# EAGLE board Layout (EAGLE 8.4.0)
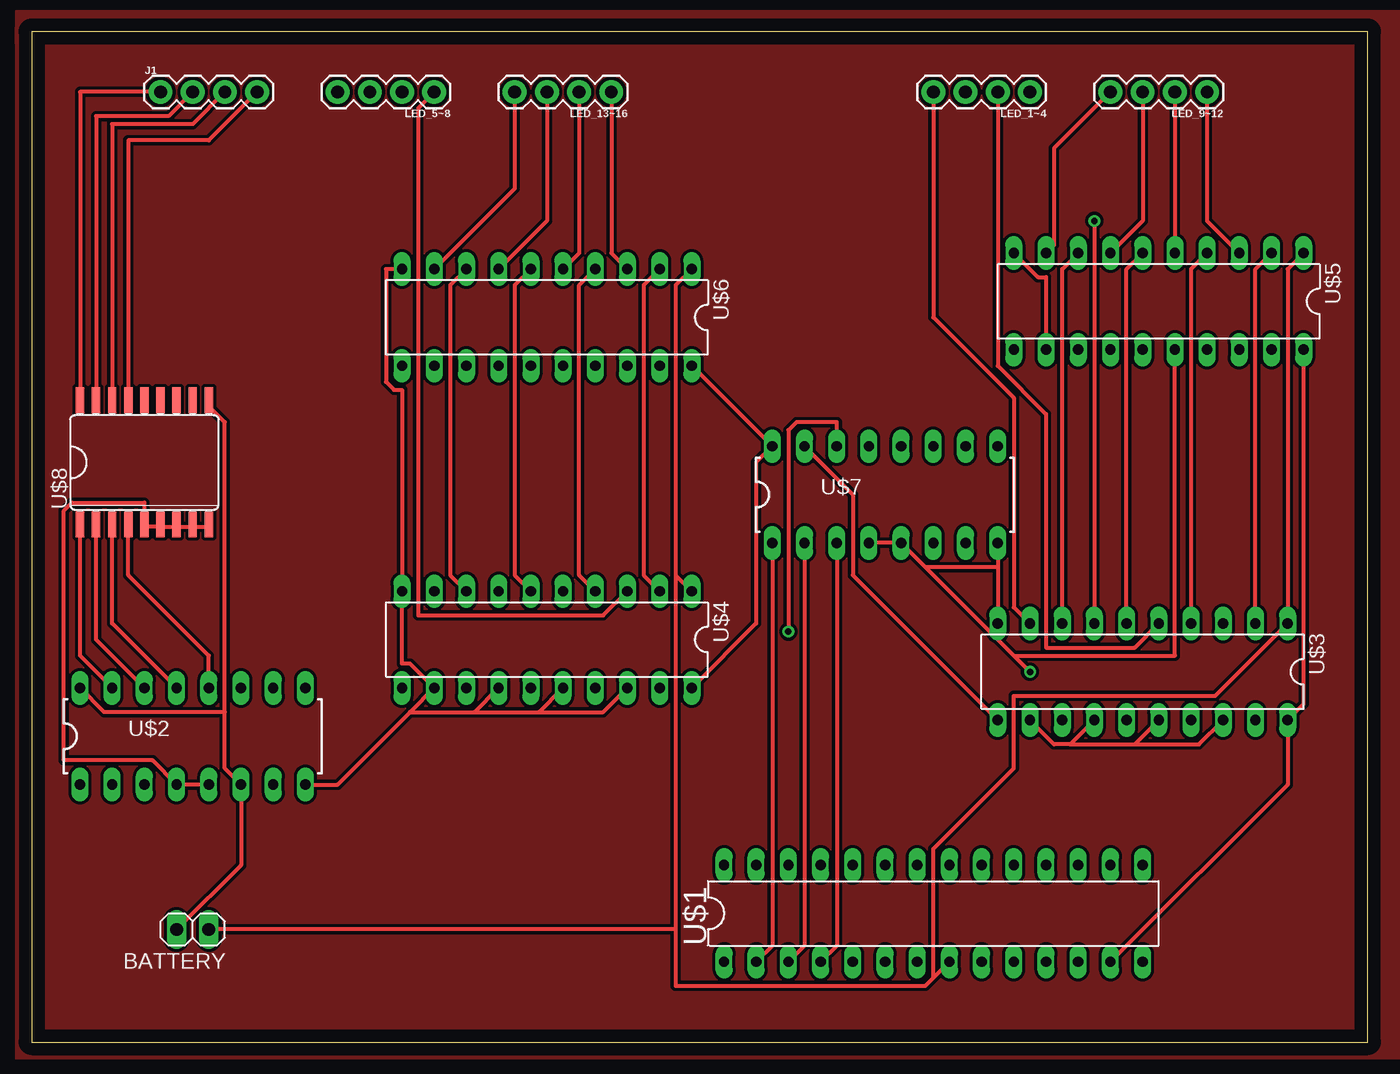
[diagram p0: board, top side]
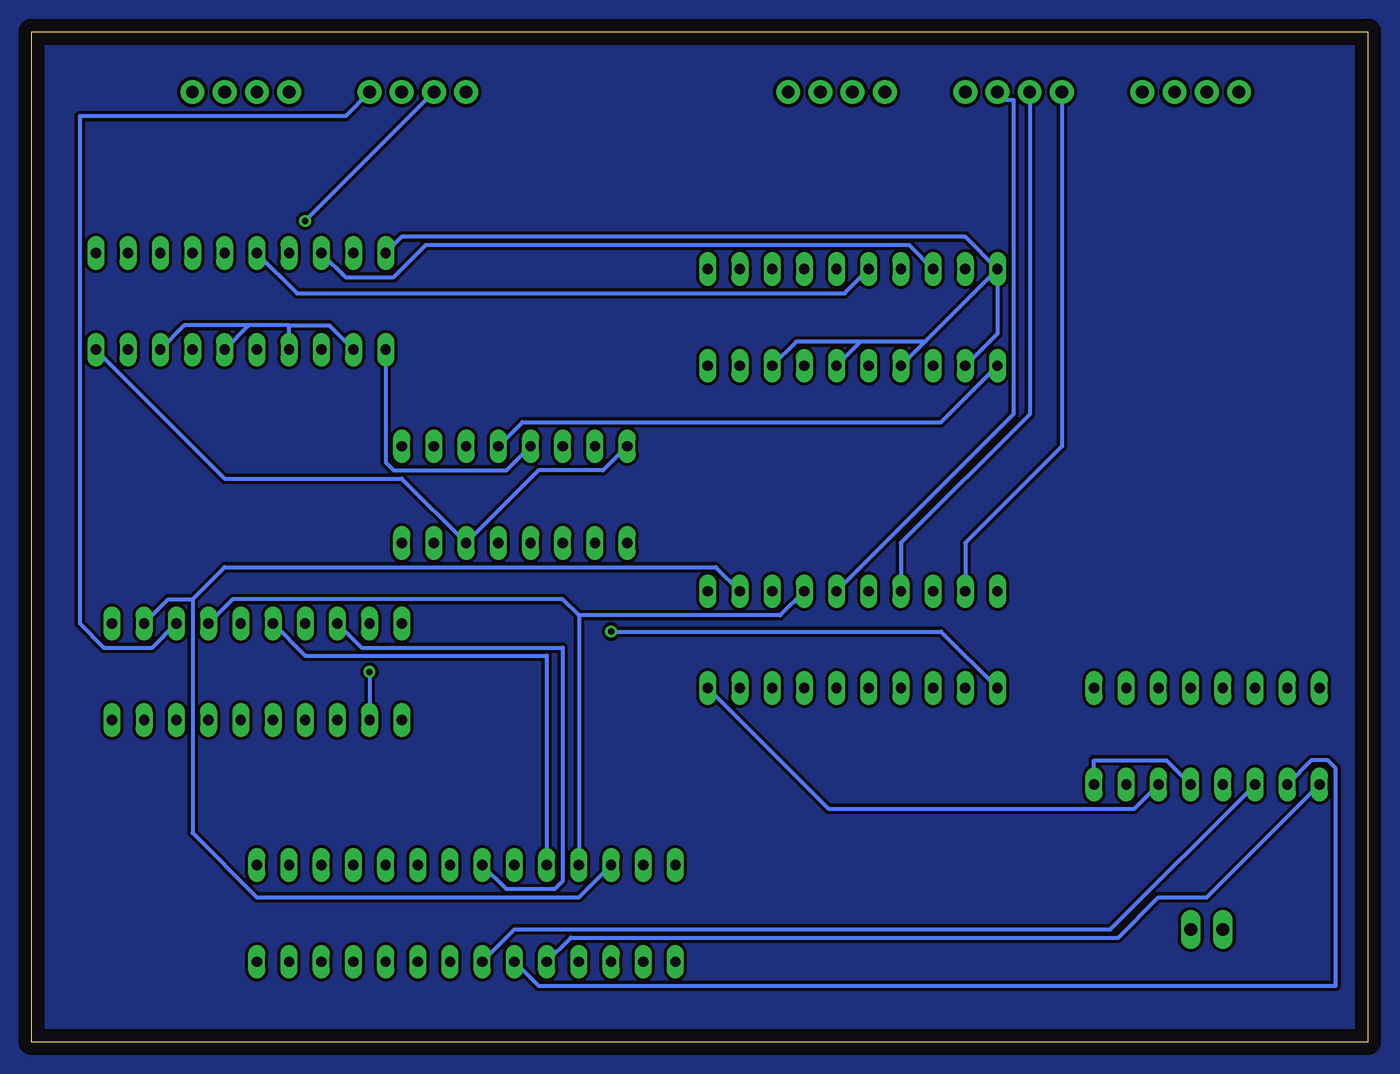
[diagram p1: board, bottom side, seen from below]

Size 105.39 x 79.68 mm. Coordinates in mm from the lower left corner, seen from the top.
Outline: 0,0 105.39,0 105.39,79.68 0,79.68 0,0
Copper layers (1*16): Top 0.035mm / dielectric 1.5mm / Bottom 0.035mm
Design rules "default": minimum track width 6mil, minimum drill 0.35mm, track to track 6mil, track to pad 6mil, pad to pad 6mil, via to via 6mil, smd to smd 6mil, copper to edge 40mil, drill to drill 6mil, minimum pad ring 10mil, minimum via ring 8mil, stop-mask expansion 4mil, vias tented up to drill 0mil, thermal gap 10mil
Net classes: 0 default: width 0.305 mm, drill 0.508 mm, clearance 0.254 mm

## Footprints (pad centres in the part's own frame; a part is rotated, then mirrored left to right if it is on the bottom)
1X02 = drill 1.016 long: 1 -1.27,0; 2 1.27,0
1X04 = drill 1.016 pad 1.88: 1 0,0; 2 2.54,0; 3 5.08,0; 4 7.62,0
DIL28-3 = drill 0.813 long: 1 -16.51,-3.81; 2 -13.97,-3.81; 3 -11.43,-3.81; 4 -8.89,-3.81; 5 -6.35,-3.81; 6 -3.81,-3.81; 7 -1.27,-3.81; 8 1.27,-3.81; 9 3.81,-3.81; 10 6.35,-3.81; 11 8.89,-3.81; 12 11.43,-3.81; 13 13.97,-3.81; 14 16.51,-3.81; 15 16.51,3.81; 16 13.97,3.81; 17 11.43,3.81; 18 8.89,3.81; 19 6.35,3.81; 20 3.81,3.81; 21 1.27,3.81; 22 -1.27,3.81; 23 -3.81,3.81; 24 -6.35,3.81; 25 -8.89,3.81; 26 -11.43,3.81; 27 -13.97,3.81; 28 -16.51,3.81
DIL16 = drill 0.813 long: 1 -8.89,-3.81; 2 -6.35,-3.81; 3 -3.81,-3.81; 4 -1.27,-3.81; 5 1.27,-3.81; 6 3.81,-3.81; 7 6.35,-3.81; 8 8.89,-3.81; 9 8.89,3.81; 10 6.35,3.81; 11 3.81,3.81; 12 1.27,3.81; 13 -1.27,3.81; 14 -3.81,3.81; 15 -6.35,3.81; 16 -8.89,3.81
DIL20 = drill 0.813 long: 1 -11.43,-3.81; 2 -8.89,-3.81; 3 -6.35,-3.81; 4 -3.81,-3.81; 5 -1.27,-3.81; 6 1.27,-3.81; 7 3.81,-3.81; 8 6.35,-3.81; 9 8.89,-3.81; 10 11.43,-3.81; 11 11.43,3.81; 12 8.89,3.81; 13 6.35,3.81; 14 3.81,3.81; 15 1.27,3.81; 16 -1.27,3.81; 17 -3.81,3.81; 18 -6.35,3.81; 19 -8.89,3.81; 20 -11.43,3.81
SO18L = smd 0.66 x 2.032: 1 -5.08,-4.902; 2 -3.81,-4.902; 3 -2.54,-4.902; 4 -1.27,-4.902; 5 0,-4.902; 6 1.27,-4.902; 7 2.54,-4.902; 8 3.81,-4.902; 9 5.08,-4.902; 10 5.08,4.902; 11 3.81,4.902; 12 2.54,4.902; 13 1.27,4.902; 14 0,4.902; 15 -1.27,4.902; 16 -2.54,4.902; 17 -3.81,4.902; 18 -5.08,4.902

## Placement (x,y rotation side)
BATTERY  [1X02]  12.7,8.89 180 top
J1  [1X04]  10.16,74.93 0 top
LED_1~4  LED4  [1X04]  78.74,74.93 180 top
LED_5~8  LED4  [1X04]  31.75,74.93 180 top
LED_9~12  LED4  [1X04]  92.71,74.93 180 top
LED_13~16  LED4  [1X04]  45.72,74.93 180 top
U$1  PIC32MX250F128B  [DIL28-3]  71.12,10.16 0 top
U$2  CD74HC238E  [DIL16]  12.7,24.13 0 top
U$3  SN74ABT374AN  [DIL20]  87.63,29.21 180 top
U$4  SN74ABT374AN  [DIL20]  40.64,31.75 180 top
U$5  SN74ABT374AN  [DIL20]  88.9,58.42 180 top
U$6  SN74ABT374AN  [DIL20]  40.64,57.15 180 top
U$7  CD74HC238E  [DIL16]  67.31,43.18 0 top
U$8  ULN2803  [SO18L]  8.89,45.72 0 top

## Library data of the parts
BATTERY = pinhead
J1 = SparkFun-Connectors; PROD_ID: CONN-09696
LED_1~4 LED_5~8 LED_9~12 LED_13~16 U$1-U$7 = ECE411
U$8 = uln2803

## Nets
DIODE: BATTERY.2 U$1.13 U$2.6 U$2.16 U$3.20 U$4.20 U$5.20 U$6.20 U$7.6 U$7.16 U$8.10
GND: U$2.4 U$2.5 U$2.8 U$3.10 U$3.12 U$3.14 U$3.16 U$3.18 U$4.10 U$4.12 U$4.14 U$4.16 U$4.18 U$5.10 U$5.12 U$5.14 U$5.16 U$5.18 U$6.10 U$6.12 U$6.14 U$6.16 U$6.18 U$7.4 U$7.5 U$7.8 U$8.5 U$8.6 U$8.7 U$8.8 U$8.9
LED1: LED_1~4.1 U$3.3
N$1: U$2.15 U$8.1
N$2: U$2.14 U$8.2
N$3: U$2.13 U$8.3
N$4: U$2.12 U$8.4
N$9: J1.1 U$8.18
N$10: J1.2 U$8.17
N$11: J1.3 U$8.16
N$12: J1.4 U$8.15
N$17: U$1.5 U$2.1
N$18: U$1.6 U$2.2
N$19: U$1.7 U$2.3
N$20: LED_9~12.1 U$5.3
N$21: BATTERY.1 U$1.8 U$3.1 U$4.1 U$5.1 U$6.1
N$22: U$1.26 U$3.2 U$4.2 U$5.2 U$6.2
N$23: U$1.25 U$3.4 U$4.4 U$5.4 U$6.4
N$24: U$1.22 U$3.8 U$4.8 U$5.8 U$6.8
N$25: U$1.24 U$3.6 U$4.6 U$5.6 U$6.6
N$31: U$3.11 U$7.15
N$32: U$4.11 U$7.14
N$33: U$1.3 U$7.2
N$34: U$1.4 U$7.3
N$35: U$5.11 U$7.13
N$36: U$6.11 U$7.12
N$38: LED_9~12.2 U$5.5
N$39: U$1.2 U$7.1
N$40: LED_1~4.2 U$3.5
N$41: LED_1~4.3 U$3.7
N$42: LED_1~4.4 U$3.9
N$43: LED_9~12.3 U$5.7
N$44: LED_9~12.4 U$5.9
N$47: LED_5~8.1 U$4.3
N$48: LED_5~8.2 U$4.5
N$49: LED_5~8.3 U$4.7
N$50: LED_5~8.4 U$4.9
N$63: LED_13~16.1 U$6.3
N$64: LED_13~16.2 U$6.5
N$65: LED_13~16.3 U$6.7
N$66: LED_13~16.4 U$6.9

## Tracks (layer width: path | path; a pad name or v marks a point on that pad's centre or on a via)
DIODE
  Top 0.305: 15.24,26.04 15.24,21.59 U$2.6 16.51,13.97 BATTERY.2 | 15.24,26.04 15.24,48.9 13.97,50.16 U$8.10 | U$2.16 5.72,26.04 15.24,26.04 | U$4.20 57.15,33.02 57.15,45.72 U$7.16 U$6.20 | U$1.13 99.06,20.32 U$3.20 100.33,26.67 U$5.20
  Bottom 0.305: U$7.16 60.33,45.09 65.41,45.09 U$7.6 76.2,44.45 90.17,44.45 U$5.20 | U$2.6 18.42,18.41 42.55,18.41 U$4.20
GND  (via drill 0.51)
  Top 0.305: U$7.4 U$7.5 70.48,37.47 | U$7.8 76.2,37.47 | 76.2,37.47 U$3.10 | 76.2,37.47 70.48,37.47 | U$2.5 U$2.4 9.53,22.22 2.54,22.22 2.54,41.91 3.18,42.55 8.89,42.55 U$8.5 8.89,40.64 10.16,40.64 | U$3.12 80.65,23.49 81.92,23.49 | U$3.14 81.92,23.49 | 87,23.49 U$3.16 | 81.92,23.49 87,23.49 | U$3.18 92.08,23.49 87,23.49 | 29.84,26.04 24.13,20.32 U$2.8 | 29.84,26.04 U$4.12 29.84,29.85 29.21,29.85 U$4.10 29.21,51.44 28.58,51.44 27.94,52.07 27.94,60.96 U$6.10 | 34.92,26.04 U$4.14 | 29.84,26.04 34.92,26.04 | 40.01,26.04 U$4.16 | 34.92,26.04 40.01,26.04 | U$4.18 45.09,26.04 40.01,26.04 | 70.48,37.47 77.47,30.48 | 77.47,30.48 v78.74,29.21 | U$5.12 80.01,60.32 79.38,60.32 U$5.10 | U$5.16 90.17,30.48 77.47,30.48 | 10.16,40.64 11.43,40.64 | 10.16,40.64 U$8.6 | 11.43,40.64 12.7,40.64 | 11.43,40.64 U$8.7 | 12.7,40.64 13.97,40.64 U$8.9 | 12.7,40.64 U$8.8
  Bottom 0.305: U$5.10 76.2,63.5 31.75,63.5 U$6.10 | U$5.12 81.92,56.52 85.09,56.52 | U$5.14 85.09,56.52 | 88.27,56.52 U$5.16 | 85.09,56.52 88.27,56.52 | U$5.18 93.34,56.52 88.27,56.52 | U$6.12 29.21,55.88 U$6.10 | U$6.10 34.92,55.25 | 34.92,55.25 U$6.14 | 40.01,55.25 U$6.16 | 34.92,55.25 40.01,55.25 | U$6.18 45.09,55.25 40.01,55.25 | v78.74,29.21 U$3.12 | U$2.5 15.88,22.22 21.59,22.22 U$2.8
LED1
  Bottom 0.305: U$3.3 95.88,31.11 99.69,31.11 101.6,33.02 101.6,73.02 80.65,73.02 LED_1~4.1
N$1
  Top 0.305: U$8.1 3.81,30.48 U$2.15
N$2
  Top 0.305: U$8.2 5.08,31.75 U$2.14
N$3
  Top 0.305: U$8.3 6.35,33.02 U$2.13
N$4
  Top 0.305: U$8.4 7.62,36.83 13.97,30.48 U$2.12
N$5
  pour Top: -1.27,80.01 -1.27,-1.27 107.95,-1.27 107.95,81.28 106.68,81.28 -1.27,81.28 -1.27,78.74
N$6
  pour Bottom: -2.54,81.28 -2.54,-3.81 109.22,-3.81 109.22,-2.54 109.22,82.55 106.68,82.55 -2.54,82.55 -2.54,80.01
N$9
  Top 0.305: U$8.18 3.81,74.93 J1.1
N$10
  Top 0.305: U$8.17 5.08,73.02 10.8,73.02 J1.2
N$11
  Top 0.305: U$8.16 6.35,72.39 12.7,72.39 J1.3
N$12
  Top 0.305: U$8.15 7.62,71.12 13.97,71.12 J1.4
N$17
  Bottom 0.305: U$2.1 12.7,11.43 16.51,11.43 19.69,8.25 62.87,8.25 U$1.5
N$18
  Bottom 0.305: U$2.2 4.45,22.22 3.18,22.22 2.54,21.59 2.54,4.44 65.41,4.44 U$1.6
N$19
  Bottom 0.305: U$2.3 20.32,8.89 67.31,8.89 U$1.7
N$20
  Top 0.305: U$5.3 92.71,64.77 LED_9~12.1
N$21
  Top 0.305: U$5.1 99.06,60.96 U$3.1 93.34,27.3 77.47,27.3 77.47,21.59 71.12,15.24 71.12,5.08 | 50.8,36.83 U$4.1 | 50.8,36.83 50.8,59.69 U$6.1 | 71.12,5.08 70.48,4.44 50.8,4.44 50.8,8.89 | 71.12,5.08 U$1.8 | 50.8,36.83 50.8,8.89 | 50.8,8.89 BATTERY.1
N$22
  Top 0.305: U$4.2 48.26,36.83 48.26,59.69 U$6.2 | U$5.2 96.52,60.96 U$3.2
  Bottom 0.305: U$1.26 62.23,11.43 87.63,11.43 92.71,16.51 92.71,34.93 | 92.71,34.93 94.62,34.93 U$3.2 | U$4.2 51.44,37.47 90.17,37.47 92.71,34.93
N$23
  Top 0.305: U$3.4 91.44,60.96 U$5.4 | U$6.4 43.18,59.69 43.18,36.83 U$4.4
  Bottom 0.305: 62.23,33.66 U$1.25 | 62.23,33.66 46.36,33.66 U$4.4 | U$3.4 89.53,34.93 63.5,34.93 62.23,33.66
N$24
  Top 0.305: U$4.8 33.02,36.83 33.02,59.69 U$6.8 | U$5.8 81.28,60.96 U$3.8
  Bottom 0.305: U$1.22 67.95,12.06 64.14,12.06 63.5,12.7 63.5,31.11 79.38,31.11 U$3.8 | U$6.8 36.2,62.87 74.3,62.87 76.84,60.32 80.65,60.32 U$5.8
N$25
  Top 0.305: U$4.6 38.1,36.83 38.1,59.69 U$6.6 | U$5.6 86.36,60.96 U$3.6
  Bottom 0.305: U$1.24 64.77,30.48 83.82,30.48 U$3.6 | U$6.6 41.28,59.05 84.45,59.05 U$5.6
N$31
  Top 0.305: U$3.11 64.77,36.83 64.77,43.18 U$7.15
N$32  (via drill 0.51)
  Top 0.305: v59.69,32.39 59.69,48.26 60.33,48.9 63.5,48.9 U$7.14
  Bottom 0.305: U$4.11 33.66,32.39 v59.69,32.39
N$33
  Top 0.305: U$1.3 60.96,7.62 U$7.2
N$34
  Top 0.305: U$1.4 63.5,7.62 U$7.3
N$35
  Bottom 0.305: U$7.13 67.95,45.09 76.84,45.09 77.47,45.72 U$5.11
N$36
  Bottom 0.305: U$6.11 33.66,48.9 66.67,48.9 U$7.12
N$38
  Top 0.305: LED_9~12.2 U$5.5
N$39
  Top 0.305: U$1.2 58.42,7.62 U$7.1
N$40
  Top 0.305: U$3.5 87,31.11 80.01,31.11 80.01,49.53 76.2,53.34 LED_1~4.2
N$41  (via drill 0.51)
  Top 0.305: v83.82,64.77 U$3.7
  Bottom 0.305: LED_1~4.3 v83.82,64.77
N$42
  Top 0.305: U$3.9 77.47,34.29 77.47,50.8 71.12,57.15 LED_1~4.4
N$43
  Top 0.305: U$5.7 87.63,64.77 LED_9~12.3
N$44
  Top 0.305: U$5.9 80.65,62.87 80.65,70.48 LED_9~12.4
N$47
  Top 0.305: U$4.3 45.09,33.66 30.48,33.66 30.48,73.66 LED_5~8.1
N$48
  Bottom 0.305: U$4.5 27.94,49.53 27.94,74.3 28.58,74.3 LED_5~8.2
N$49
  Bottom 0.305: U$4.7 36.83,39.37 26.67,49.53 LED_5~8.3
N$50
  Bottom 0.305: U$4.9 31.75,39.37 24.13,46.99 LED_5~8.4
N$63
  Top 0.305: U$6.3 45.72,62.23 LED_13~16.1
N$64
  Top 0.305: U$6.5 43.18,62.23 LED_13~16.2
N$65
  Top 0.305: U$6.7 40.64,64.77 LED_13~16.3
N$66
  Top 0.305: U$6.9 38.1,67.31 LED_13~16.4